# Altium PCB board.PcbDoc
Units mm, origin at the board's own origin, x right, y up, seen from the top; angles counter-clockwise.
Board outline 61.34 x 54.74 mm, 4 copper layers (Top Layer, POWER, GND, Bottom Layer), stack 0.778 mm thick; 27 components, 47 nets, 185 pads, 0 vias.
Unrouted connection lines stored in the file: 70.
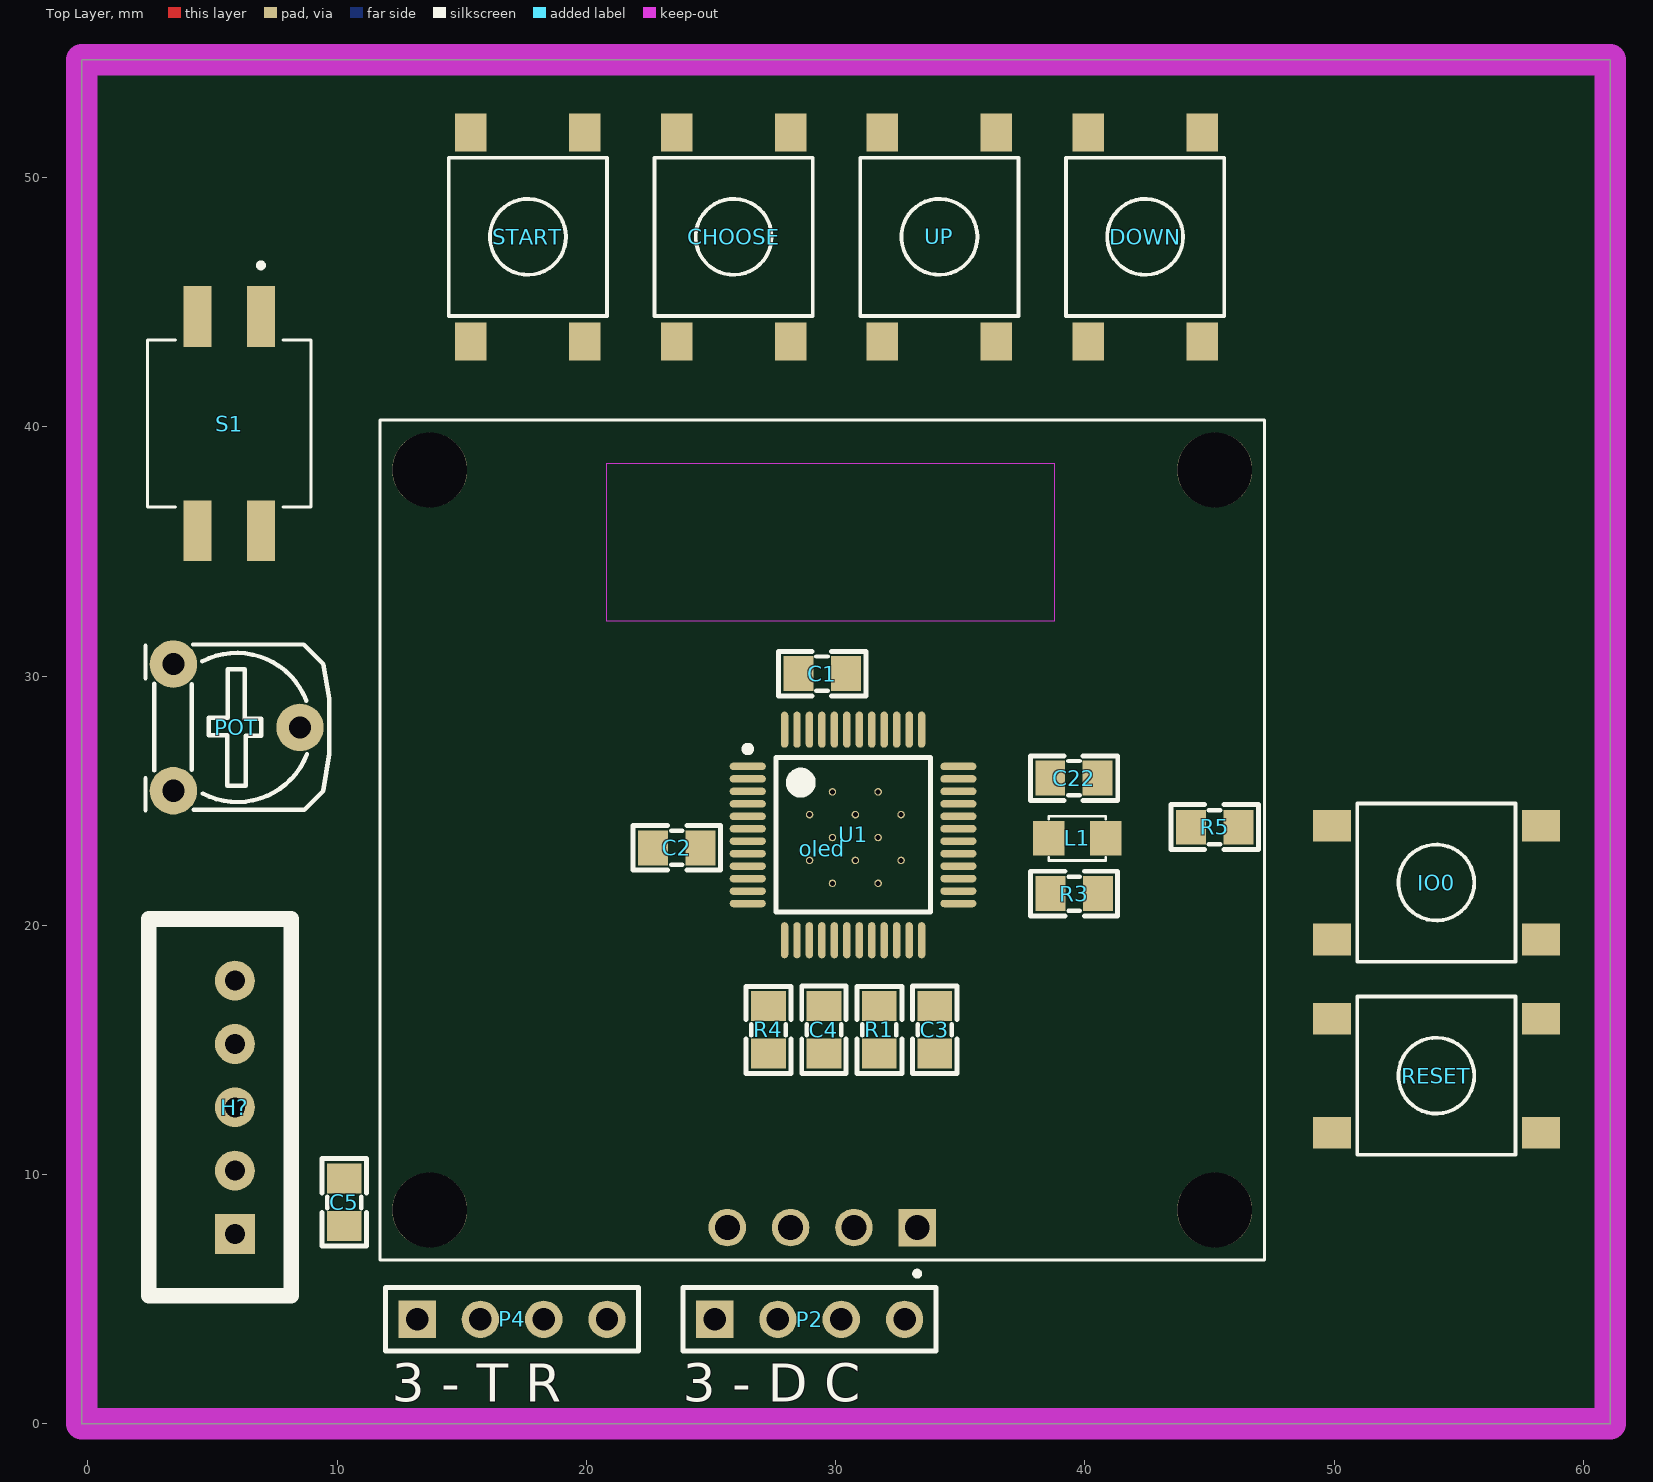
[diagram p0: Top Layer view]
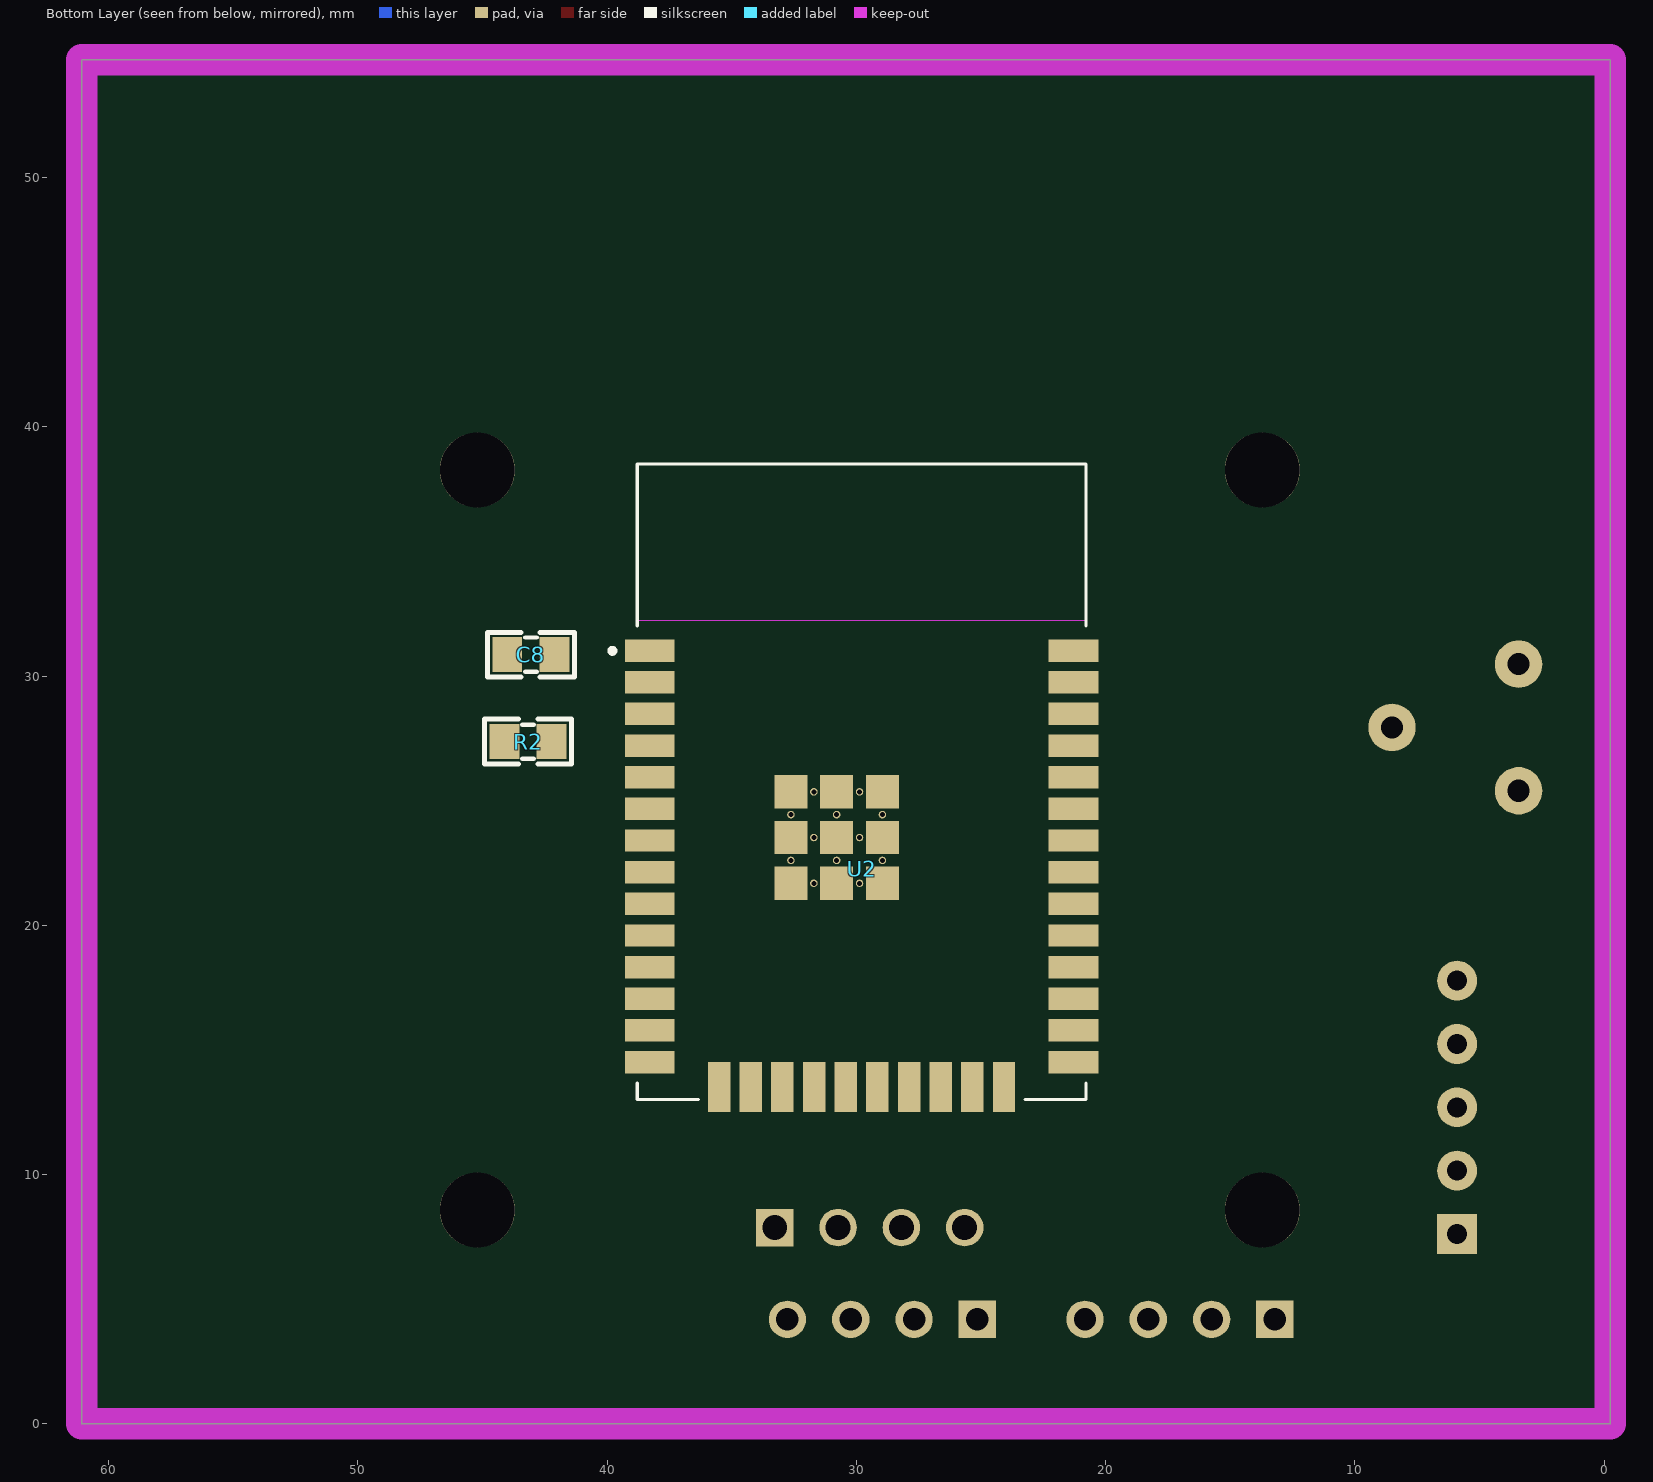
[diagram p1: Bottom Layer view, seen from below]

## Layer stack, top to bottom
Top Solder: solder mask 0.0102, Solder Resist, Dk 3.5
Top Layer: signal copper 0.0356
Dielectric 1: core 0.254, FR-4, Dk 4.2
POWER: signal copper 0.036
Dielectric 3: prepreg 0.127, Dk 4.2
GND: signal copper 0.036
Dielectric 2: core 0.254, Dk 4.2
Bottom Layer: signal copper 0.0356
Bottom Solder: solder mask 0.0102, Solder Resist, Dk 3.5

## Board outline
-0.254,0 61.087,0 61.087,54.737 -0.254,54.737

## Design rules (kind name [scope] priority, off if disabled: settings)
Clearance [All] p1: gap=0.15
PolygonConnect [All] p1: connectstyle=Relief reliefconductorwidth=0.254 reliefentries=4 polygonreliefangle="90 Angle" airgapwidth=0.254
RoutingVias [All] p1: holewidth=0.4 width=0.7 viastyle="Through Hole" minholewidth=0.4 minwidth=0.7 maxholewidth=0.4 maxwidth=0.7
SolderMaskExpansion [All] p1: expansion=0.102
Width [All] p1: maxlimit=1 minlimit=0.15 preferedwidth=0.254 midlayer1_minwidth=0.254 midlayer1_maxwidth=0.254 midlayer2_minwidth=0.254 midlayer2_maxwidth=0.254 minimp=50.000000 maximp=50.000000 favimp=50.000000
30 further rules are at their usual default settings.

## Components (designator, comment, footprint, x,y, rotation, side; value= is the part's Value field where it differs from the comment)
C1 "104" "tu 0805" 29.464,30.099 r180 top
C2 "104" "tu 0805" 23.622,23.114 r0 top
C3 "104" "tu 0805" 33.975,15.807 r90 top
C4 "104" "tu 0805" 29.53,15.807 r90 top
C5 "104" "tu 0805" 10.287,8.89 r270 top
C8 "104" "tu 0805" 43.053,30.861 r0 bottom
C22 "104" "tu 0805" 39.567,25.905 r180 top
CHOOSE "Nut Nhan 4 Chan SMD 6x6" "Nut Nhan 4 Chan SMD 6x6" 25.908,47.625 r90 top
DOWN "Nut Nhan 4 Chan SMD 6x6" "Nut Nhan 4 Chan SMD 6x6" 42.418,47.625 r90 top
H? "Header 5P 2.54 Duc Thang" XH2.54M-5 5.898,7.62 r90 top
IO0 "Nut Nhan 4 Chan SMD 6x6" "Nut Nhan 4 Chan SMD 6x6" 54.102,21.717 r0 top
L1 "LED 0805" LED-0805-Blue 38.551,23.492 r0 top
oled "OLED_128X64_1.3_I2C" LCD_OLED_128X64_1.3_I2C 29.464,23.424 r180 top
P2 "STLINK" HDR1X4 25.146,4.191 r0 top
P4 "TTL" HDR1X4 13.208,4.191 r0 top
POT "10K" "Bien Tro Tam Giac Dung" 3.429,30.48 r270 top
R1 "10K" "tro smd 0805" 31.689,15.805 r90 top
R2 "10k" "tro smd 0805" 43.18,27.432 r180 bottom
R3 "330" "tro smd 0805" 39.567,21.333 r0 top
R4 "10K" "tro smd 0805" 27.244,15.805 r90 top
R5 "10k" "tro smd 0805" 45.212,23.876 r180 top
RESET "Nut Nhan 4 Chan SMD 6x6" "Nut Nhan 4 Chan SMD 6x6" 54.102,13.97 r0 top
S1 "219-2MSTR" SW_219-2MSTR 5.671,40.132 r270 top
START "Nut Nhan 4 Chan SMD 6x6" "Nut Nhan 4 Chan SMD 6x6" 17.653,47.625 r90 top
U1 "STM32F103xx_LQFP48" STM32_LQPF48 30.7,23.626 r0 top
U2 "ESP32-WROOM-32D-N4" MODULE_ESP32-WROOM-32D-N4 29.791,25.763 r180 bottom
UP "Nut Nhan 4 Chan SMD 6x6" "Nut Nhan 4 Chan SMD 6x6" 34.163,47.625 r90 top

## Footprints (in the part's own frame and the unit in brackets; to place one, negate y for a bottom-side part, rotate by r counter-clockwise, add the part's x,y. Pads: shape width x height; smd on the part's side, far side on the other; paste and mask are expansions set on the pad)
"Bien Tro Tam Giac Dung" [mil] "RM065"
  round 75 hole 35: 1(0,0) 2(100,200) 3(200,0)
  silkscreen extent -31,-44 231,246, body extent -28,-50 228,228, height 279
HDR1X4 [mm] "Connector; Header; 4 Position"
  rect 1.5x1.5 hole 0.9: 1(0,0)
  round 1.5 hole 0.9: 2(2.54,0) 3(5.08,0) 4(7.62,0)
  silkscreen extent -1.27,-1.27 8.89,1.27
LCD_OLED_128X64_1.3_I2C [mm]
  rect 1.508x1.508 / inner round 1.508 / far side rect 1.508x1.508 hole 1: 1(-3.81,15.55)
  round 1.508 hole 1: 2(-1.27,15.55) 3(1.27,15.55) 4(3.81,15.55)
  round 3 hole 3 unplated: ""(-15.75,14.85) ""(-15.75,-14.85) ""(15.75,14.85) ""(15.75,-14.85)
  silkscreen extent -17.75,-16.85 17.75,17.5, body extent -17.87,-16.93 17.78,16.67, height 10.8
LED-0805-Blue [mil]
  rect 50x55 smd: 1(0,0) 2(90,0)
  silkscreen extent 0,-35 90,35, body extent 5,-25 85,25, height 43
MODULE_ESP32-WROOM-32D-N4 [mm]
  rect 2x0.9 smd: 1(-8.5,5.26) 2(-8.5,3.99) 3(-8.5,2.72) 4(-8.5,1.45) 5(-8.5,0.18) 6(-8.5,-1.09) 7(-8.5,-2.36) 8(-8.5,-3.63) 9(-8.5,-4.9) 10(-8.5,-6.17) 11(-8.5,-7.44) 12(-8.5,-8.71) 13(-8.5,-9.98) 14(-8.5,-11.25) 25(8.5,-11.25) 26(8.5,-9.98) 27(8.5,-8.71) 28(8.5,-7.44) 29(8.5,-6.17) 30(8.5,-4.9) 31(8.5,-3.63) 32(8.5,-2.36) 33(8.5,-1.09) 34(8.5,0.18) 35(8.5,1.45) 36(8.5,2.72) 37(8.5,3.99) 38(8.5,5.26)
  rect 0.9x2 smd: 15(-5.715,-12.25) 16(-4.445,-12.25) 17(-3.175,-12.25) 18(-1.905,-12.25) 19(-0.635,-12.25) 20(0.635,-12.25) 21(1.905,-12.25) 22(3.175,-12.25) 23(4.445,-12.25) 24(5.715,-12.25)
  rect 1.33x1.33 smd: 39_1(-2.835,-0.405) 39_2(-1,-0.405) 39_3(0.835,-0.405) 39_4(-2.835,-2.24) 39_5(-1,-2.24) 39_6(0.835,-2.24) 39_7(-2.835,-4.075) 39_8(-1,-4.075) 39_9(0.835,-4.075)
  round 0.3 hole 0.2: 39_10(-1.917,-0.405) 39_11(-0.082,-0.405) 39_12(-2.835,-1.322) 39_13(-1,-1.322) 39_14(0.835,-1.322) 39_15(-1.917,-2.24) 39_16(-0.082,-2.24) 39_17(-2.835,-3.157) 39_18(-1,-3.157) 39_19(0.835,-3.157) 39_20(-1.917,-4.075) 39_21(-0.082,-4.075)
  Keep-Out Layer region: 9,6.45 -9,6.45 -9,12.75 9,12.75
  silkscreen extent -10.1,-12.75 9,12.75, body extent -9,-12.75 9,12.75, height 3.25
"Nut Nhan 4 Chan SMD 6x6" [mil] "SW SMD button 4pin, 250 x250 mil"
  rect 60x50 smd: 1(-165,90) 2(165,-90) 3(165,90) 4(-165,-90)
  silkscreen extent -125,-125 125,125, body extent -180,-125 180,125, height 130
STM32_LQPF48 [mm]
  oval 1.45x0.3 smd: 1(-4.225,2.75) 2(-4.225,2.25) 3(-4.225,1.75) 4(-4.225,1.25) 5(-4.225,0.75) 6(-4.225,0.25) 7(-4.225,-0.25) 8(-4.225,-0.75) 9(-4.225,-1.25) 10(-4.225,-1.75) 11(-4.225,-2.25) 12(-4.225,-2.75) 25(4.225,-2.75) 26(4.225,-2.25) 27(4.225,-1.75) 28(4.225,-1.25) 29(4.225,-0.75) 30(4.225,-0.25) 31(4.225,0.25) 32(4.225,0.75) 33(4.225,1.25) 34(4.225,1.75) 35(4.225,2.25) 36(4.225,2.75)
  oval 0.3x1.45 smd: 13(-2.75,-4.225) 14(-2.25,-4.225) 15(-1.75,-4.225) 16(-1.25,-4.225) 17(-0.75,-4.225) 18(-0.25,-4.225) 19(0.25,-4.225) 20(0.75,-4.225) 21(1.25,-4.225) 22(1.75,-4.225) 23(2.25,-4.225) 24(2.75,-4.225) 37(2.75,4.225) 38(2.25,4.225) 39(1.75,4.225) 40(1.25,4.225) 41(0.75,4.225) 42(0.25,4.225) 43(-0.25,4.225) 44(-0.75,4.225) 45(-1.25,4.225) 46(-1.75,4.225) 47(-2.25,4.225) 48(-2.75,4.225)
  silkscreen extent -4.35,-3.1 3.1,3.57, body extent -4.5,-4.5 4.5,4.5, height 1.6
SW_219-2MSTR [mm]
  rect 2.44x1.13 smd: 1A(-4.3,1.27) 1B(4.3,1.27) 2A(-4.3,-1.27) 2B(4.3,-1.27)
  silkscreen extent -6.45,-3.27 3.35,3.27, body extent -4.95,-3.27 4.95,3.27, height 4.58
"tro smd 0805" [mm]
  rect 1.2x1.4 smd: 1(-0.946,-0.061) 2(0.954,-0.061)
  silkscreen extent -1.75,-0.97 1.75,0.84, body extent -1.56,-0.76 1.44,0.64, height 0.53
"tu 0805" [mm] "Compoment SMD 80x50mil"
  rect 1.2x1.4 smd: 1(-0.946,-0.003) 2(0.954,-0.003)
  silkscreen extent -1.75,-0.89 1.75,0.89, body extent -1.01,-0.64 1.01,0.63, height 0.61
XH2.54M-5 [mm]
  rect 1.6x1.6 hole 0.8: 1(0,0)
  round 1.6 hole 0.8: 2(2.54,0) 3(5.08,0) 4(7.62,0) 5(10.16,0)
  silkscreen extent -2.48,-2.26 12.64,3.46, body extent -2.48,-2.26 12.64,3.48, height 6.91

## Part data
C1 C2 C3 C4 C5 C8 C22: library part "Tu 0805 104 50V 10%", "Dán"
CHOOSE DOWN IO0 RESET START UP: "Nut Nhan 4 Chan 6.2x6.2x3.5"
H?: "C?m"
L1: library part "LED 0805 Xanh Duong", "Dán"
oled: "Non-Touch Graphic LCD Display Module Transmissive White OLED, Monochrome I2C 1.3 (33.02mm) 128 x 64"
P2 P4: library part "Header 4", "Header, 4-Pin"
POT: library part "Bien tro tam giac 10K Dung", "C?m"
R1 R2 R3 R4 R5: library part "Tro 0805 1% 0.33R", "Dán"
S1: "Dip Switch SPST 2 Position Surface Mount Slide (Standard) Actuator 100mA 20VDC"
U2: "Bluetooth, WiFi 802.11b/g/n, Bluetooth v4.2 +EDR, Class 1, 2 and 3 Transceiver Module 2.4GHz ~ 2.5GHz Integrated, Trace Surface Mount"

## Nets (pads, with @x,y where several pads share a name; then routed paths per layer and width w, separated by ;. In a path a pad name is that pad's centre, name@x,y a point inside that pad or via, vN(x,y) a via of type N, cw(c..) or ccw(c..) an arc to the next point about the centre after c; other vN are vias at no path point)
BOOT: U1.44
C: P2.4 U1.37
D: P2.3 U1.34
GND: C1.1 C2.1 C3.1 C4.2 C5.1 C8.1 C22.1 CHOOSE.4 DOWN.4 H?.2 IO0.4 oled.2 P2.2 P4.2 POT.3 R1.1 R3.2 RESET.4 START.4 U1.8 U1.23 U1.35 U1.47 U2.1 U2.15 UP.4
NetIO0_1: IO0.1 R5.1 U2.25
NetL1_2: L1.2 R3.1
NetR1_2: R1.2 U1.20
NetR2_2: R2.2 U2.3
NRST: C4.1 R4.1 RESET.1 U1.7
PA0: U1.10
PA1: U1.11
PA2: H?.3 U1.12
PA3: H?.4 U1.13
PA4: U1.14
PA5: U1.15
PA6: U1.16
PA7: U1.17
PA8: U1.29
PA9: U1.30
PA10: U1.31
PA11: START.1 U1.32
PA12: CHOOSE.1 U1.33
PA15: U1.38
PB0: U1.18
PB0MCU2: H?.5 POT.2
PB1: U1.19
PB3: U1.39
PB4: U1.40
PB5: U1.41
PB6: S1.2A U1.42
PB7: S1.1A U1.43
PB8: U1.45
PB9: U1.46
PB10: oled.3 U1.21
PB11: oled.4 U1.22
PB12: U1.25
PB13: U1.26
PB14: U1.27 UP.1
PB15: DOWN.1 U1.28
PC13: U1.2
PC14: U1.3
PC15: U1.4
PD0: U1.5
PD1: U1.6
RX: P4.4 S1.2B U2.34
TX: P4.3 S1.1B U2.35
VDD: C1.2 C2.2 C3.2 C5.2 C8.2 C22.2 H?.1 L1.1 oled.1 P2.1 P4.1 POT.1 R2.1 R4.2 R5.2 U1.1 U1.9 U1.24 U1.36 U1.48 U2.2
pads on no net: CHOOSE.2 CHOOSE.3 DOWN.2 DOWN.3 IO0.2 IO0.3 oled. RESET.2 RESET.3 START.2 START.3 U2.4 U2.5 U2.6 U2.7 U2.8 U2.9 U2.10 U2.11 U2.12 U2.13 U2.14 U2.16 U2.17 U2.18 U2.19 U2.20 U2.21 U2.22 U2.23 U2.24 U2.26 U2.27 U2.28 U2.29 U2.30 U2.31 U2.32 U2.33 U2.36 U2.37 U2.38 U2.39_1 U2.39_2 U2.39_3 U2.39_4 U2.39_5 U2.39_6 U2.39_7 U2.39_8 U2.39_9 U2.39_10 U2.39_11 U2.39_12 U2.39_13 U2.39_14 U2.39_15 U2.39_16 U2.39_17 U2.39_18 U2.39_19 U2.39_20 U2.39_21 UP.2 UP.3

## Keep-outs
Keep-Out Layer:
  the board outline again, w1.27

## Silkscreen, mask and mechanical layers (free items; w line width, h text height)
Top Overlay:
  text "3 - T R" at 12.192,0.889 h1.52
  text "3 - D C" at 23.876,0.889 h1.52

## Text inside footprints (layer, text, board x,y; h text height)
U2: Mechanical 13 "ANTENNA" at 35.791,34.763 h1.78